# Altium PCB EzRing.PcbDoc
Units mm, origin at the board's own origin, x right, y up, seen from the top; angles counter-clockwise.
Board outline 50 x 50 mm, 2 copper layers (Top Layer, Bottom Layer); 34 components, 31 nets, 138 pads, 0 vias.
Unrouted connection lines stored in the file: 58.
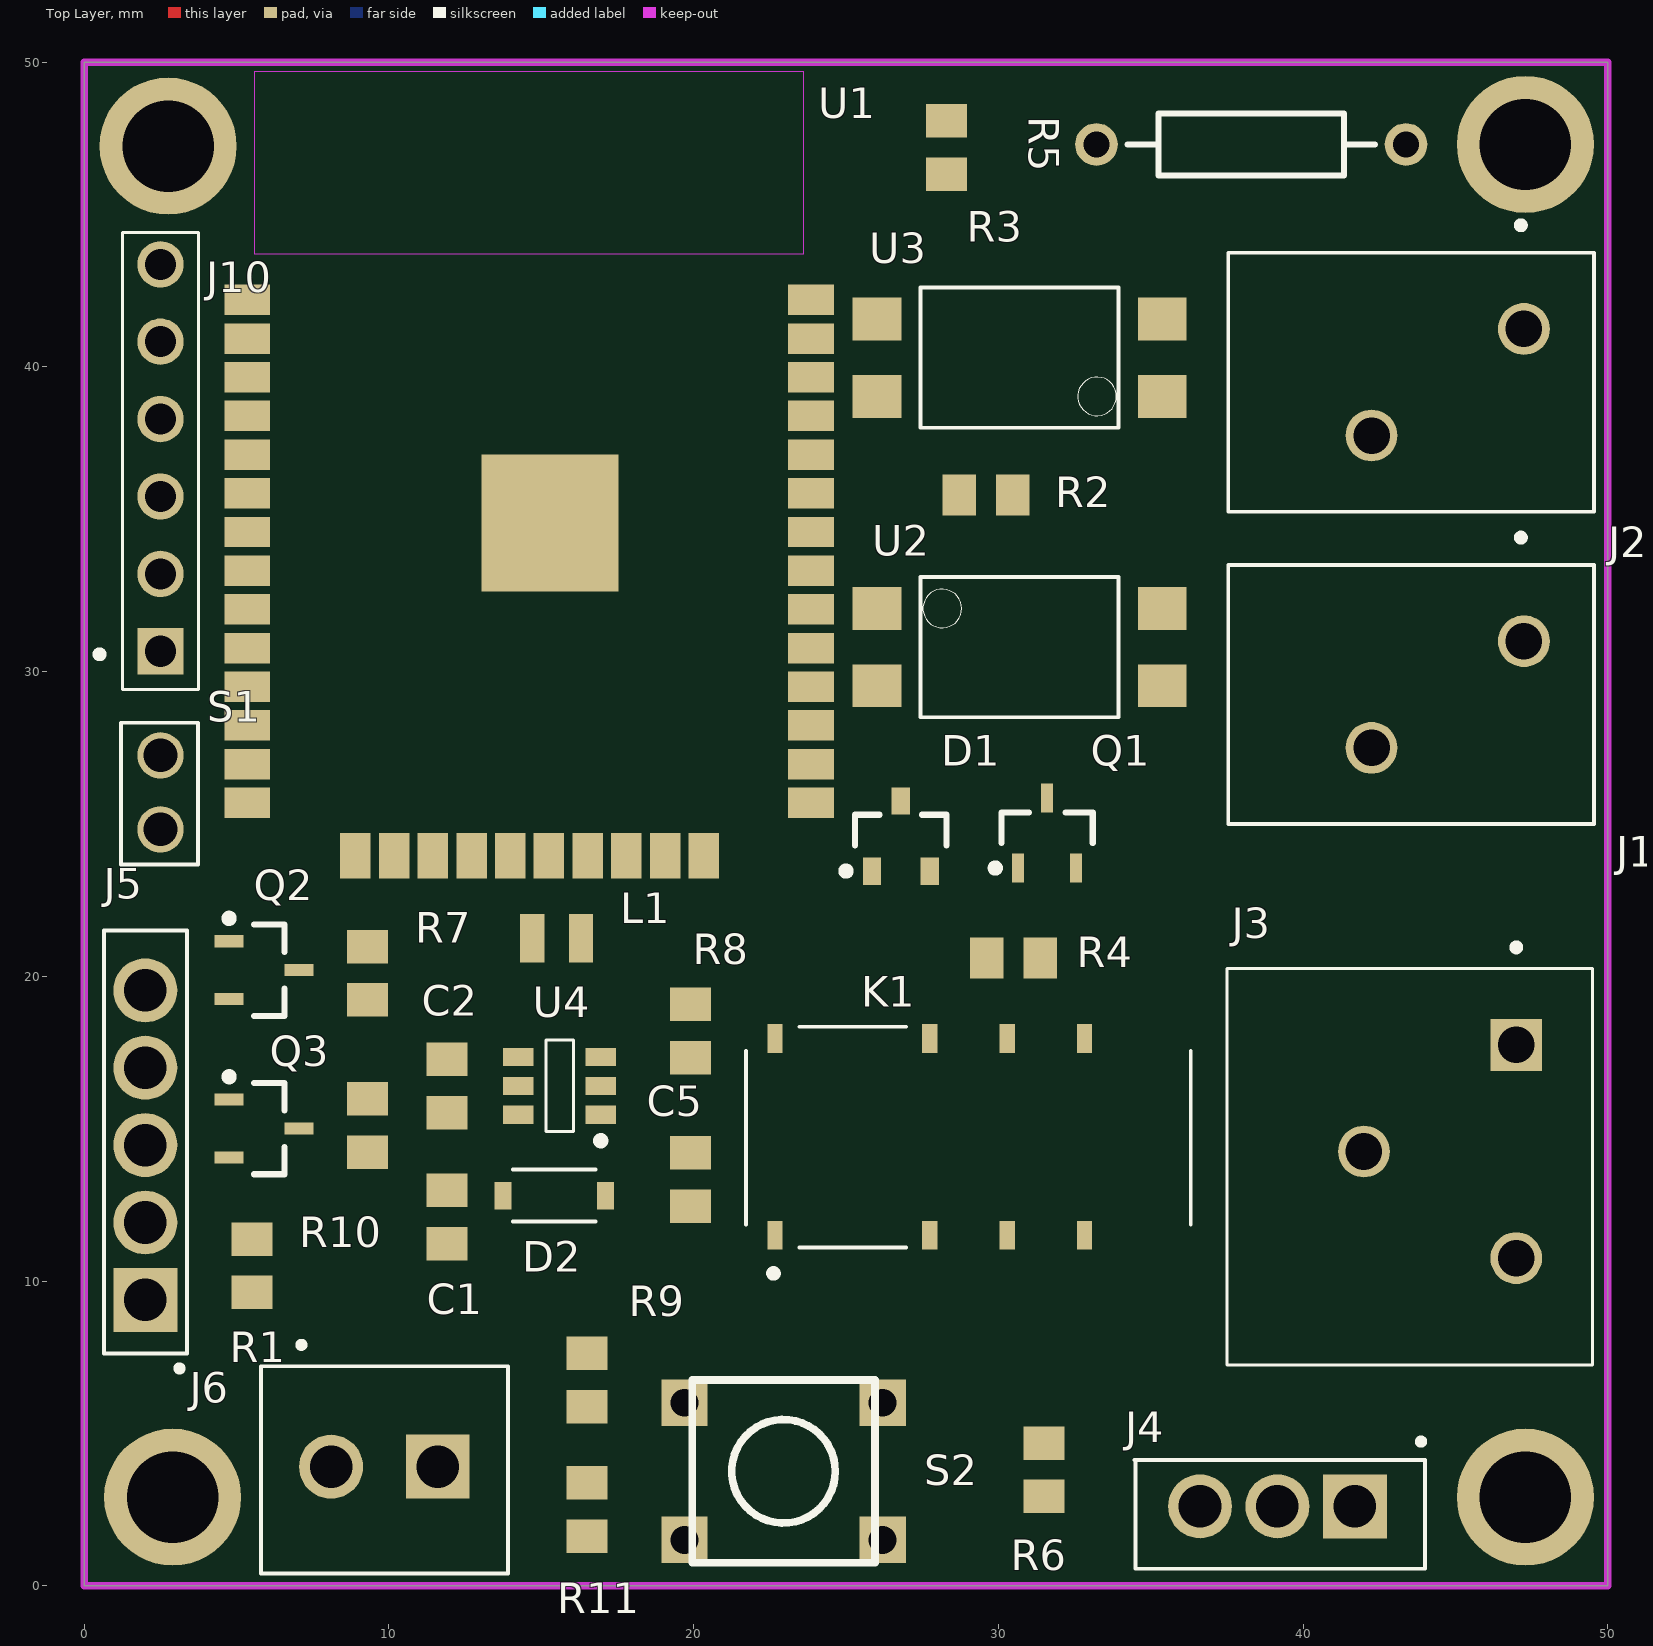
[diagram p0: Top Layer view]
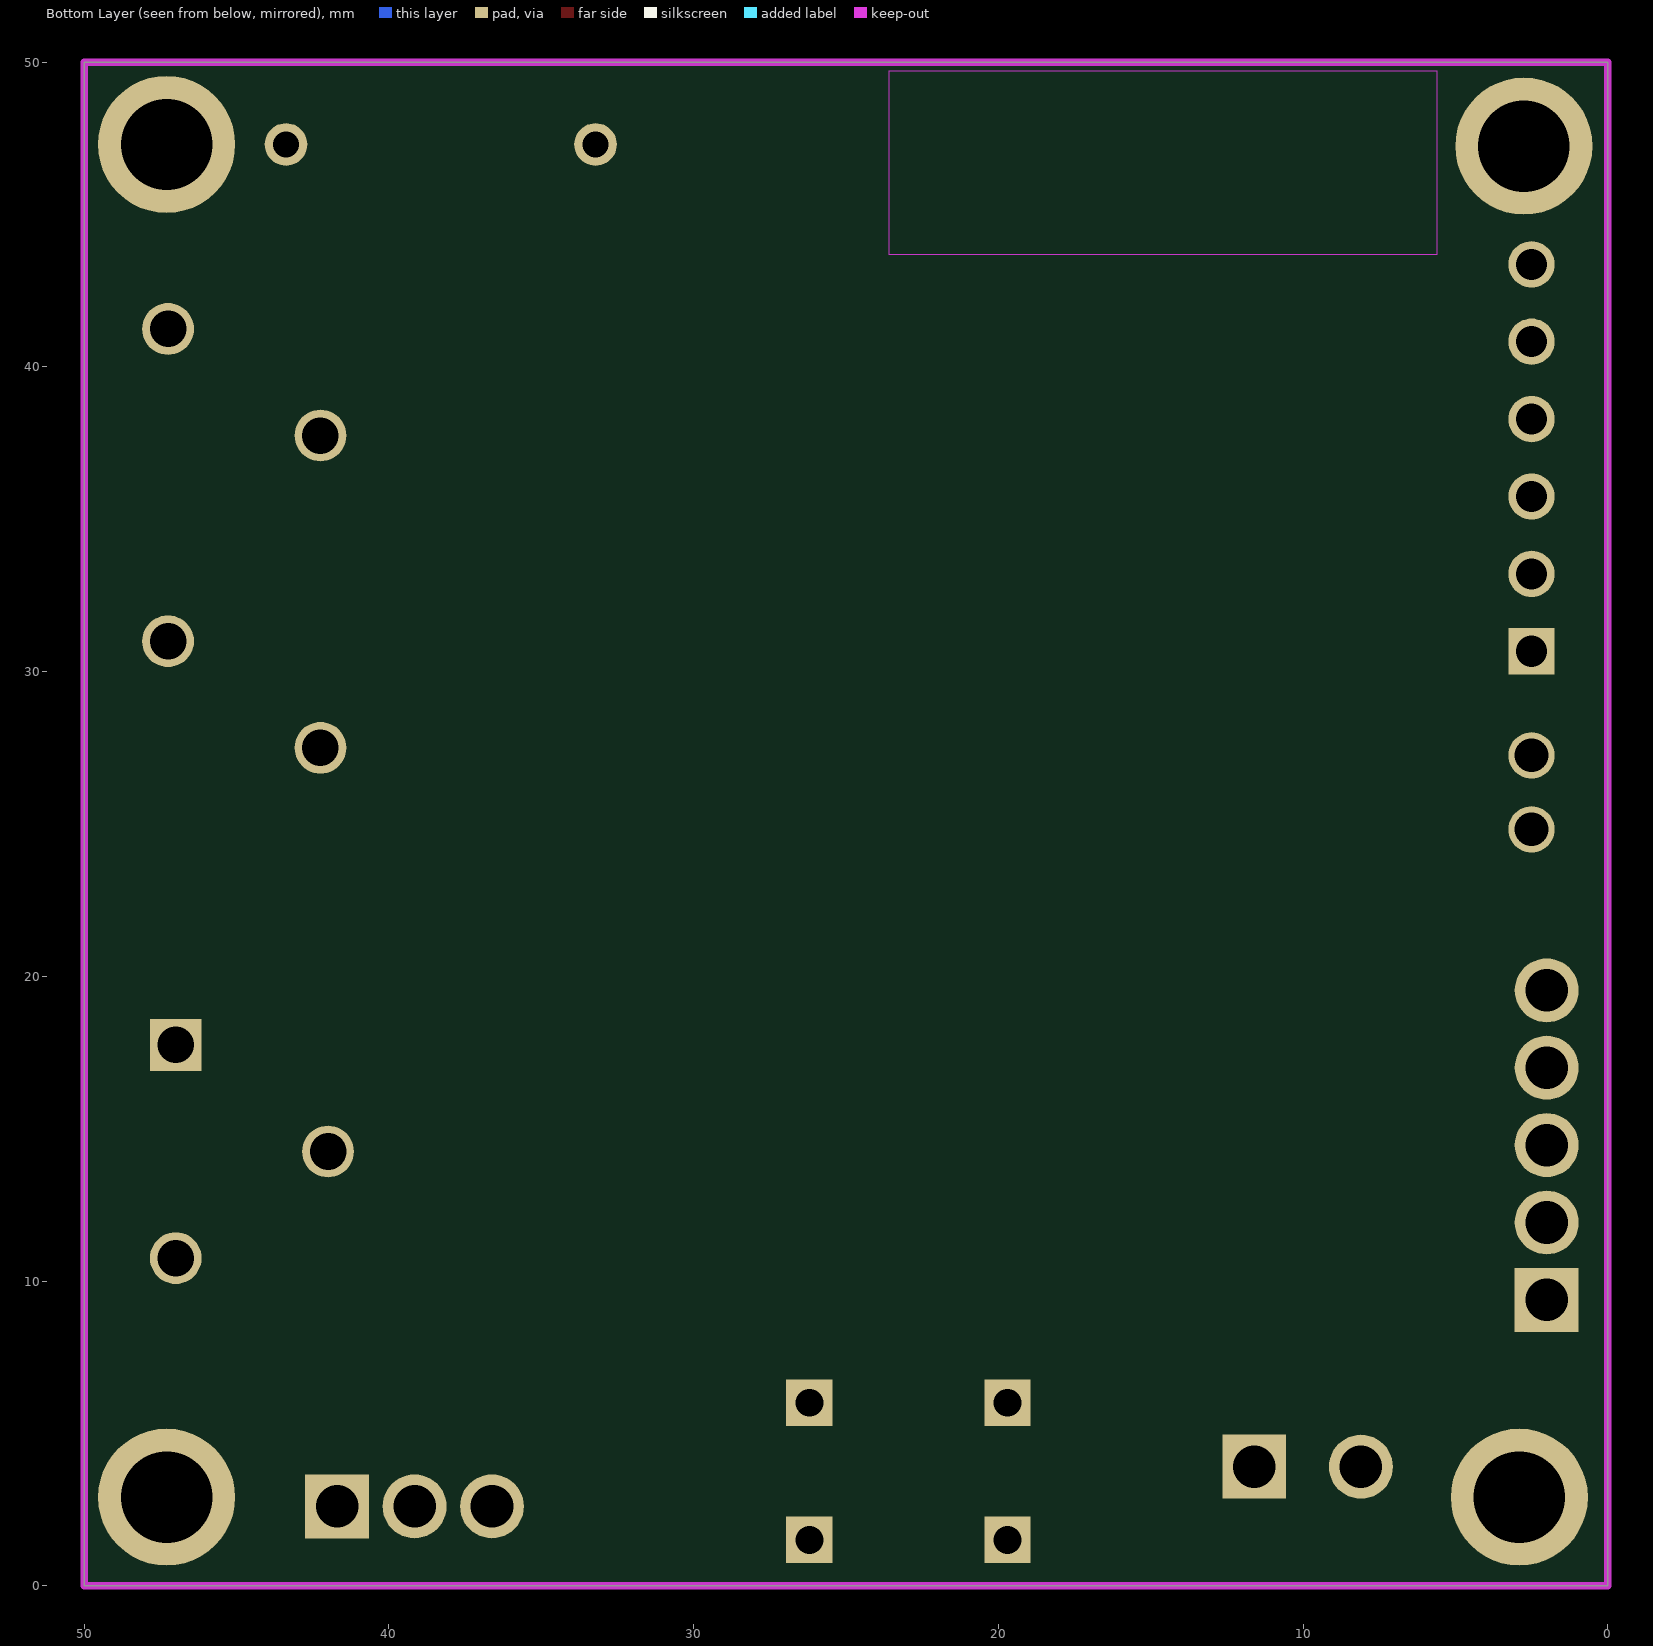
[diagram p1: Bottom Layer view, seen from below]

## Layer stack, top to bottom
Top Solder: solder mask 0.0102, Solder Resist, Dk 3.5
Top Layer: signal copper 0.0356
Dielectric 1: dielectric 0.32, FR-4, Dk 4.8
Bottom Layer: signal copper 0.0356
Bottom Solder: solder mask 0.0102, Solder Resist, Dk 3.5

## Board outline
0,50 50,50 50,0 0,0

## Design rules (kind name [scope] priority, off if disabled: settings)
Clearance [All] p1: gap=0.254 ignorepadtopadclearanceinfootprint=FALSE except(0: Arc-Hole Track-Hole SMDPad-Hole THPad-Hole Via-Hole Fill-Hole Poly-Hole Region-Hole Text-Hole)
PolygonConnect [All] p1: connectstyle=Relief reliefconductorwidth=0.254 reliefentries=4 polygonreliefangle="90 Angle" airgapwidth=0.254
RoutingVias [All] p1: holewidth=0.711 width=1.27 viastyle="Through Hole" minholewidth=0.711 minwidth=1.27 maxholewidth=0.711 maxwidth=1.27
SolderMaskExpansion [All] p1: expansion=0.102 istentingtop=FALSE
Width [All] p1: maxlimit=0.254 minlimit=0.254 preferedwidth=0.254
30 further rules are at their usual default settings.

## Classes and differential pairs
component class EzRing: * C1 C2 C5 D1 D2 J5 J6 Q1 Q2 Q3 R1 R2 R3 R4 R5 R6 R7 R8 R9 R10 R11 S1 S2 U1 U2 U3 U4

## Components (designator, comment, footprint, x,y, rotation, side; value= is the part's Value field where it differs from the comment)
C1 "10nF" 0805 11.9,12.104 r90 top
C2 "10uF" 0805 11.9,16.404 r270 top
C5 "22uF" 0805 19.9,13.329 r90 top
D1 "BAT54C" "BAT54 series" 26.8,24.604 r90 top
D2 "SS1030_R1_00001" "SOD123 DIODE" 15.4,12.904 r0 top
J1 "Comment" "TERM.BLK.3.50MM 2P" 47.25,31 r270 top
J2 "Comment" "TERM.BLK.3.50MM 2P" 47.25,41.25 r270 top
J3 "Comment" "TERM.BLK.3.50MM 3P" 47,17.75 r270 top
J4 "2.54 mm" HEADER-2.54-03 41.7,2.604 r180 top
J5 "2.54 mm" HEADER-2.54-5P 2,9.38 r90 top
J6 "DG350-3.5-02P" Header-3.5-02 11.6,3.904 r180 top
J10 "Comment" DS1029-01 2.5,30.67 r90 top
K1 "Comment" "RELAY/8 Pin Surface Mount" 22.67,11.5 r0 top
L1 "Comment" INDP2523X23N 15.5,21.25 r0 top
Q1 "BC818" BC818 31.6,24.704 r90 top
Q2 "BC818" BC818 5.9,20.204 r0 top
Q3 "BC818" BC818 5.9,15.004 r0 top
R1 "12K" 0805 5.5,10.5 r270 top
R2 "680" 0805 29.6,35.804 r0 top
R3 "12K" 0805 28.3,47.204 r270 top
R4 "12K" 0805 30.5,20.604 r180 top
R5 "680" AXIAL-0.4 38.3,47.304 r180 top
R6 "12K" 0805 31.5,3.804 r90 top
R7 "12K" 0805 9.3,20.104 r270 top
R8 "100K" 0805 19.9,18.204 r270 top
R9 "12K" 0805 16.5,6.75 r270 top
R10 "12K" 0805 9.3,15.104 r90 top
R11 "2.87K" 0805 16.5,2.5 r90 top
S1 "Reset" "Kısa Devre anahtarlaması" 2.5,27.25 r0 top
S2 "Button" "Push Button" 26.2,1.504 r90 top
U1 "ESP32-S" ESP-32S 14.6,35.204 r0 top
U2 "LTV-816S-TP-C" "OPTO LTV-816S" 30.7,30.804 r270 top
U3 "LTV-816S-TP-C" "OPTO LTV-816S" 30.7,40.304 r90 top
U4 "MP2359" "MP2359 vol reg TSOT23-6" 15.6,16.404 r180 top

## Footprints (in the part's own frame and the unit in brackets; to place one, negate y for a bottom-side part, rotate by r counter-clockwise, add the part's x,y. Pads: shape width x height; smd on the part's side, far side on the other; paste and mask are expansions set on the pad)
0805 [mm] "Chip Resistor, 2-Leads, Body 2,00x1,23mm, IPC Medium Density"
  rect 1.1x1.35 smd: 1(-0.875,0) 2(0.875,0)
  body extent -1.07,-0.67 1.08,0.67, height 0.65
AXIAL-0.4 [mm] "Axial Device, Thru-Hole; 2 Leads; 0.4 in Pin Spacing"
  round 1.4 hole 0.85: 1(-5.08,0) 2(5.08,0)
  silkscreen extent -4.06,-1.02 4.06,1.02
"BAT54 series" [mm] "Schottky barrier diodes SOT23, 3-Leads,"
  rect 0.9x0.6 smd: 1(-1.15,0.95) 2(-1.15,-0.95) 3(1.15,0)
  silkscreen extent -1.27,-1.5 0.7,1.92, body extent -0.7,-1.5 0.7,1.5, height 1.1
BC818 [mm] "SOT23127P600-8N"
  rect 0.95x0.4 smd: 1(-1.15,0.95) 2(-1.15,-0.95) 3(1.15,0)
  silkscreen extent -1.27,-1.5 0.67,1.82, body extent -0.67,-1.47 0.67,1.48, height 1.1
DS1029-01 [mil] "DS1029-01-1X6P8BVB-ABC 6 Pin Header"
  rect 60x60 hole 40.16: 1(0,0)
  round 60 hole 40.16: 2(100,0) 3(200,0) 4(300,0) 5(400,0) 6(500,0)
  silkscreen extent -49,-49 541,83
ESP-32S [mm]
  rect 1.5x1 smd: 1(-9.25,7) 2(-9.25,5.73) 3(-9.25,4.46) 4(-9.25,3.19) 5(-9.25,1.92) 6(-9.25,0.65) 7(-9.25,-0.62) 8(-9.25,-1.89) 9(-9.25,-3.16) 10(-9.25,-4.43) 11(-9.25,-5.7) 12(-9.25,-6.97) 13(-9.25,-8.24) 14(-9.25,-9.51) 25(9.25,-9.51) 26(9.25,-8.24) 27(9.25,-6.97) 28(9.25,-5.7) 29(9.25,-4.43) 30(9.25,-3.16) 31(9.25,-1.89) 32(9.25,-0.62) 33(9.25,0.65) 34(9.25,1.92) 35(9.25,3.19) 36(9.25,4.46) 37(9.25,5.73) 38(9.25,7)
  rect 1x1.5 smd: 15(-5.7,-11.25) 16(-4.43,-11.25) 17(-3.16,-11.25) 18(-1.89,-11.25) 19(-0.62,-11.25) 20(0.65,-11.25) 21(1.92,-11.25) 22(3.19,-11.25) 23(4.46,-11.25) 24(5.73,-11.25)
  rect 4.5x4.5 smd: GND(0.68,-0.33)
  Keep-Out Layer region: 9,8.5 -9,8.5 -9,14.5 9,14.5
  Keep-Out Layer region: 9,8.5 -9,8.5 -9,14.5 9,14.5
HEADER-2.54-03 [mm]
  rect 2.1x2.1 hole 1.4: 1(0,0)
  round 2.1 hole 1.4: 2(2.54,0) 3(5.08,0)
  silkscreen extent -2.3,-2.22 7.22,2.05
HEADER-2.54-5P [mm] "klemens"
  rect 2.1x2.1 hole 1.4: 1(0,0)
  round 2.1 hole 1.4: 2(2.54,0) 3(5.08,0) 4(7.62,0) 5(10.16,0)
  silkscreen extent -2.35,-1.38 12.13,1.35
Header-3.5-02 [mm] "klemens"
  rect 2.1x2.1 hole 1.4: 1(0,0)
  round 2.1 hole 1.4: 2(3.5,0)
  silkscreen extent -2.3,-4.1 5.8,3.5
INDP2523X23N [mm] "TYA2016104R7M-10/Duzeltilebilir."
  rect 0.8x1.6 smd: 1(-0.8,0) 2(0.8,0)
  body extent -1.15,-0.95 1.15,0.95, height 1.15
"Kısa Devre anahtarlaması" [mil]
  round 60 hole 43.31: 1(0,0) 2(0,-95.47)
  silkscreen extent -51,-141 48,42
"MP2359 vol reg TSOT23-6" [mm] "SOT23, 6-Leads, Body 2,90x2,80mm, Pitch 0,95mm, IPC Medium Density"
  rect 1x0.6 smd: 1(-1.35,0.95) 2(-1.35,0) 3(-1.35,-0.95) 4(1.35,-0.95) 5(1.35,0) 6(1.35,0.95)
  silkscreen extent -1.48,-1.5 0.45,1.92, body extent -0.85,-1.5 0.85,1.5, height 1
"OPTO LTV-816S" [mm] "LTV-816S-TP-C - IC-816 OPTO SMD"
  rect 1.4x1.6 smd: 1(-1.27,-4.68) 2(1.27,-4.68) 3(1.27,4.68) 4(-1.27,4.68)
  silkscreen extent -2.3,-3.25 2.3,3.25
"Push Button" [mil] "KLS7-TS6601"
  rect 60x60 hole 36: 1(0,0) 2(0,255.91) 3(177.17,0) 4(177.17,255.91)
  silkscreen extent -30,10 207,246
"RELAY/8 Pin Surface Mount" [mm] "V23079G2016B301"
  rect 0.5x0.94 smd: 1(0,0) 3(5.08,0) 4(7.62,0) 5(10.16,0) 8(10.16,6.46) 9(7.62,6.46) 10(5.08,6.46) 12(0,6.46)
  silkscreen extent -0.95,-1.36 13.65,6.85
"SOD123 DIODE" [mm]
  rect 0.55x0.9 smd: 1(1.705,-0.1) 2(-1.655,-0.1)
  silkscreen extent -1.33,-0.95 1.37,0.75
"TERM.BLK.3.50MM 2P" [mm] "DG250-3.5-02P-11-00SH / Datasheet degerelerinden farkli degerler kullanildi"
  round 1.7 hole 1.2: 1(0,0) 2(3.5,-5)
  silkscreen extent -3.5,-9.7 6,2.3
"TERM.BLK.3.50MM 3P" [mm]
  rect 1.7x1.7 hole 1.2: 1(0,0)
  round 1.7 hole 1.2: 2(3.5,-5) 3(7,0)
  silkscreen extent -3.3,-9.5 10.5,2.5

## Part data
C1: library part Cap, "MLCC (2012) 0805 10nF 100VDC ±10% X7R", ComponentLink1Description=Ozdisan, ComponentLink1URL=https://ozdisan.com/pasif-komponentler/kondansatorler/smt-smd-ve-mlcc-kondansatorler/CL21B103KCANNNC, LatestRevisionDate=17-Jul-2002, LatestRevisionNote="Re-released for DXP Platform.", Ozdisan Part#=CL21B103KCANNNC, PackageDescription="Radial Cap, Thru-Hole; 2 Leads; 0.3 in Pin Spacing", PackageReference=RAD-0.3, Published=8-Jun-2000, Publisher="Altium Limited"
C2: library part Cap, "MLCC (2012) 0805 10uF 25VDC ±10% X5R", ComponentLink1Description=Ozdisan, ComponentLink1URL=https://ozdisan.com/pasif-komponentler/kondansatorler/smt-smd-ve-mlcc-kondansatorler/CL21A106KAYNNNE, LatestRevisionDate=17-Jul-2002, LatestRevisionNote="Re-released for DXP Platform.", Ozdisan Part#=CL21A106KAYNNNE, PackageDescription="Radial Cap, Thru-Hole; 2 Leads; 0.3 in Pin Spacing", PackageReference=RAD-0.3, Published=8-Jun-2000, Publisher="Altium Limited"
C5: library part Cap, "MLCC (2012) 0805 22uF 6.3VDC ±20% X5R", ComponentLink1Description=Ozdisan, ComponentLink1URL=https://ozdisan.com/pasif-komponentler/kondansatorler/smt-smd-ve-mlcc-kondansatorler/CL21A226MQQNNNE, LatestRevisionDate=17-Jul-2002, LatestRevisionNote="Re-released for DXP Platform.", Ozdisan Part#=CL21A226MQQNNNE, PackageDescription="Radial Cap, Thru-Hole; 2 Leads; 0.3 in Pin Spacing", PackageReference=RAD-0.3, Published=8-Jun-2000, Publisher="Altium Limited"
D1: library part Diode, "DIODE SCHOTTKY 2*0.2A 30V SOT23 CATHODE PHILIPS", Code_JEDEC=DO-214-AB, ComponentLink1Description=Ozdisan, ComponentLink1URL=https://www.ozdisan.com/guc-yari-iletkenleri/diyotlar-modul-diyotlar-ve-dogrultucular/schottky-diyotlar/BAT54C215, LatestRevisionDate=17-Jul-2002, LatestRevisionNote="Re-released for DXP Platform.", Ozdisan Part#=BAT54C,215, PackageDescription="DO-214-AB/SMC; 2 C-Bend Leads; Body 7.9 x 5.9 mm, inc. leads (LxW)", PackageReference=SMC, PackageVersion=Sep-1996, Published=8-Jun-2000, Publisher="Altium Limited"
D2: library part Diode, "DIODE SCHOTTKY 1A 30V SOD123 SMT", Code_JEDEC=DO-214-AB, ComponentLink1Description=Ozdisan, ComponentLink1URL=https://ozdisan.com/Product/Detail/629142/MBRS130LT3G, LatestRevisionDate=17-Jul-2002, LatestRevisionNote="Re-released for DXP Platform.", Ozdisan Part#=MBRS130LT3G, PackageDescription="DO-214-AB/SMC; 2 C-Bend Leads; Body 7.9 x 5.9 mm, inc. leads (LxW)", PackageReference=SMC, PackageVersion=Sep-1996, Published=8-Jun-2000, Publisher="Altium Limited"
J4: library part 282843-3, "TERMI-BLOCK PCB HEADER 2.54", Package=None, ComponentLink1Description=Ozdisan, Digi-Key_Part_Number=A98085-ND, DigiKey-Purchase-URL=https://snapeda.com/shop?store=DigiKey&id=2375700, EU_RoHS_Compliance="Compliant with Exemptions", MF="TE Connectivity", SnapEDA_Link=https://www.snapeda.com/parts/282843-3/TE%20Connectivity%20AMP%20Connectors/view-part/2375700/?ref=snap
J5: library part "Header 5", "Header, 5-Pin boşta kalacak.", LatestRevisionDate=17-Jul-2002, LatestRevisionNote="Re-released for DXP Platform.", Pitch=3.5, Publisher="Altium Limited"
J6: library part 282843-2, "TERM.BLK.3.81MM 2P PCB TYPE GREEN GAOSONG", Package=None, Availability=Unavailable, ComponentLink1Description=Ozdisan, ComponentLink1URL=https://ozdisan.com/konnektor-ve-baglanti-elemanlari/klemensler/pcb-klemensler/DG350-3-5-02P-14-02AH, MF="{'manufacturer': 'TE Connectivity'}", MP=282843-2, Ozdisan Part#=DG350-3.5-02P-14-02AH, Price=None
Q1 Q2 Q3: library part NPN, "BC818-16W,115 - TRANSISTOR DIS.500mA 25V NPN SOT323 GEN. SMT", ComponentLink1Description=Ozdisan, ComponentLink1URL=https://www.ozdisan.com/guc-yari-iletkenleri/transistorler/discrete-transistorler/BC818-16W115, LatestRevisionDate=17-Jul-2002, LatestRevisionNote="Re-released for DXP Platform.", Ozdisan Part#=BC818-16W,115, PackageDescription="TO, Flat Index; 3 In-Line, Axial Leads; Body Dia. 4.8mm; Leads 0.55 x 0.51 mm (max)", PackageReference=TO-226-AA, Published=8-Jun-2000, Publisher="Altium Limited"
R1 R2 R3 R4 R6 R7 R8 R9 R10 R11: library part Res2, "Resistor", LatestRevisionDate=17-Jul-2002, LatestRevisionNote="Re-released for DXP Platform.", PackageDescription="Axial Device, Thru-Hole; 2 Leads; 0.4 in Pin Spacing", PackageReference=AXIAL-0.4, Published=8-Jun-2000, Publisher="Altium Limited"
  R1 R3 R7 R9 R10: ComponentLink1Description=Ozdisan, ComponentLink1URL=https://ozdisan.com/pasif-komponentler/direncler/smt-smd-ve-cip-direncler/0805S8J0123T5E, Ozdisan Part#=0805S8J0123T5E
  R2: ComponentLink1Description="New link", ComponentLink1URL=https://www.ozdisan.com/pasif-komponentler/direncler/smt-smd-ve-cip-direncler/0805S8J0681T5E, Ozdisan Part#=0805S8J0681T5E
  R4 R6: ComponentLink1Description=Ozdisan, ComponentLink1URL=https://www.ozdisan.com/pasif-komponentler/direncler/smt-smd-ve-cip-direncler/0805S8J0123T5E, Ozdisan Part#=0805S8J0123T5E
  R8: ComponentLink1Description=Ozdisan, ComponentLink1URL=https://ozdisan.com/pasif-komponentler/direncler/smt-smd-ve-cip-direncler/0805S8J0104T5E, Ozdisan Part#=0805S8J0104T5E
  R11: ComponentLink1Description=Ozdisan, ComponentLink1URL=https://www.ozdisan.com/pasif-komponentler/direncler/smt-smd-ve-cip-direncler/0805S8F2871T5E, Ozdisan Part#=0805S8F2871T5E
R5: library part Res2, "Dip Resistor", ComponentLink1Description="New link", ComponentLink1URL=https://www.ozdisan.com/pasif-komponentler/direncler/tht-dip-direncler/MF01WJJ0681A10, LatestRevisionDate=17-Jul-2002, LatestRevisionNote="Re-released for DXP Platform.", Ozdisan Part#=MF01WJJ0681A10, PackageDescription="Axial Device, Thru-Hole; 2 Leads; 0.4 in Pin Spacing", PackageReference=AXIAL-0.4, Published=8-Jun-2000, Publisher="Altium Limited"
S1: library part SW-PB, "Burayı bir cımbız ile kısa devre yapılabilecek bir yapıda bırakacağız. buton koyulmayacak.", LatestRevisionDate=17-Jul-2002, LatestRevisionNote="Re-released for DXP Platform.", PackageDescription="Switch; 2 Leads", PackageReference=SPST-2, Published=24-Mar-1999, Publisher="Altium Limited"
S2: library part SW-PB, "PUSH", ComponentLink1Description=Ozdisan, ComponentLink1URL=https://www.ozdisan.com/elektromekanik-komponentler/sivicler-ve-anahtarlar/tact-sivicler/L-KLS7-TS6604-4-3-160-T, LatestRevisionDate=17-Jul-2002, LatestRevisionNote="Re-released for DXP Platform.", Ozdisan Part#=L-KLS7-TS6604-4.3-160-T, PackageDescription="Switch; 2 Leads", PackageReference=SPST-2, Published=24-Mar-1999, Publisher="Altium Limited"
U2 U3: library part Optoisolator1, "IC-816 OPTO SMD", ComponentLink1Description=Ozdisan, ComponentLink1URL=https://www.ozdisan.com/optolar-ve-sensorler/optolar/transistor-cikisli-optokuplorler/LTV-816S-TP-C, DatasheetVersion=Nov-2003, LatestRevisionDate=04-Mar-2005, LatestRevisionNote="Sch pins 3 & 4 Swapped.", Ozdisan Part#=LTV-816S-TP-C, PackageReference=SMD, Published=24-Mar-1999, Publisher="Altium Limited"
U4: "IC-2359 V.REG BUCK ADJ 1.2A TSOT23-6", ComponentLink1Description=Ozdisan, ComponentLink1URL=https://ozdisan.com/Product/Detail/625041/MP2359DJ-LF-Z, Ozdisan Part#=MP2359DJ-LF-Z
U1: ComponentLink1Description=ozdisan, ComponentLink1URL=https://ozdisan.com/Product/Detail/632855/ESP32-S-32MBIT, Ozdisan Part#="ESP32-S (32MBIT)"

## Free pads (board coordinates)
  round 4.5 hole 3: ""(2.75,47.25) ""(2.9,2.904) ""(47.3,2.904) ""(47.3,47.304)

## Nets (pads, with @x,y where several pads share a name; then routed paths per layer and width w, separated by ;. In a path a pad name is that pad's centre, name@x,y a point inside that pad or via, vN(x,y) a via of type N, cw(c..) or ccw(c..) an arc to the next point about the centre after c; other vN are vias at no path point)
3.3V: R1.1 R3.1 R6.2 U1.2
4.2V: C5.2 D1.2 K1.1 L1.2 R9.2
GND: C2.1 C5.1 D2.1 J5.5 J6.1 Q1.3 R11.1 S1.1 S2.2 U1.1 U1.15 U1.38 U2.2 U3.3 U4.2
GND-I: J2.1 U3.2
GND-O: J1.2 U2.3
NetC1_1: C1.1 D2.2 L1.1 U4.6
NetC1_2: C1.2 U4.1
NetC2_2: C2.2 J6.2 R8.2 U4.5
NetD1_1: D1.1 K1.12 Q1.1
NetJ1_1: J1.1 U2.4
NetJ2_2: J2.2 R5.1
NetJ3_1: J3.1 K1.3
NetJ3_2: J3.2 K1.4
NetJ3_3: J3.3 K1.5
NetJ4_1: J4.1 K1.10
NetJ4_2: J4.2 K1.9
NetJ4_3: J4.3 K1.8
NetQ1_2: Q1.2 R4.1
NetQ2_2: Q2.2 R7.1
NetQ2_3: Q2.3 R10.2
NetQ3_2: Q3.2 R10.1
NetQ3_3: Q3.3 R7.2
NetR1_2: R1.2 S1.2 U1.3
NetR2_1: R2.1 U1.37
NetR2_2: R2.2 U2.1
NetR3_2: R3.2 U1.9 U3.4
NetR4_2: R4.2 U1.28
NetR5_2: R5.2 U3.1
NetR6_1: R6.1 S2.1 U1.26
NetR8_1: R8.1 U4.4
NetR9_1: R9.1 R11.2 U4.3
pads on no net: D1.3 J5.1 J5.2 J5.3 J5.4 J10.1 J10.2 J10.3 J10.4 J10.5 J10.6 Q2.1 Q3.1 S2.3 S2.4 U1.4 U1.5 U1.6 U1.7 U1.8 U1.10 U1.11 U1.12 U1.13 U1.14 U1.16 U1.17 U1.18 U1.19 U1.20 U1.21 U1.22 U1.23 U1.24 U1.25 U1.27 U1.29 U1.30 U1.31 U1.32 U1.33 U1.34 U1.35 U1.36 U1.GND

## Keep-outs
Keep-Out Layer:
  the board outline again, w0.254